# Altium PCB CC1125_ref.PcbDoc
Units mm, origin at the board's own origin, x right, y up, seen from the top; angles counter-clockwise.
Board outline 53 x 65 mm, 2 copper layers (Top Layer, Bottom Layer); 6 components, 15 nets, 51 pads, 3 vias.
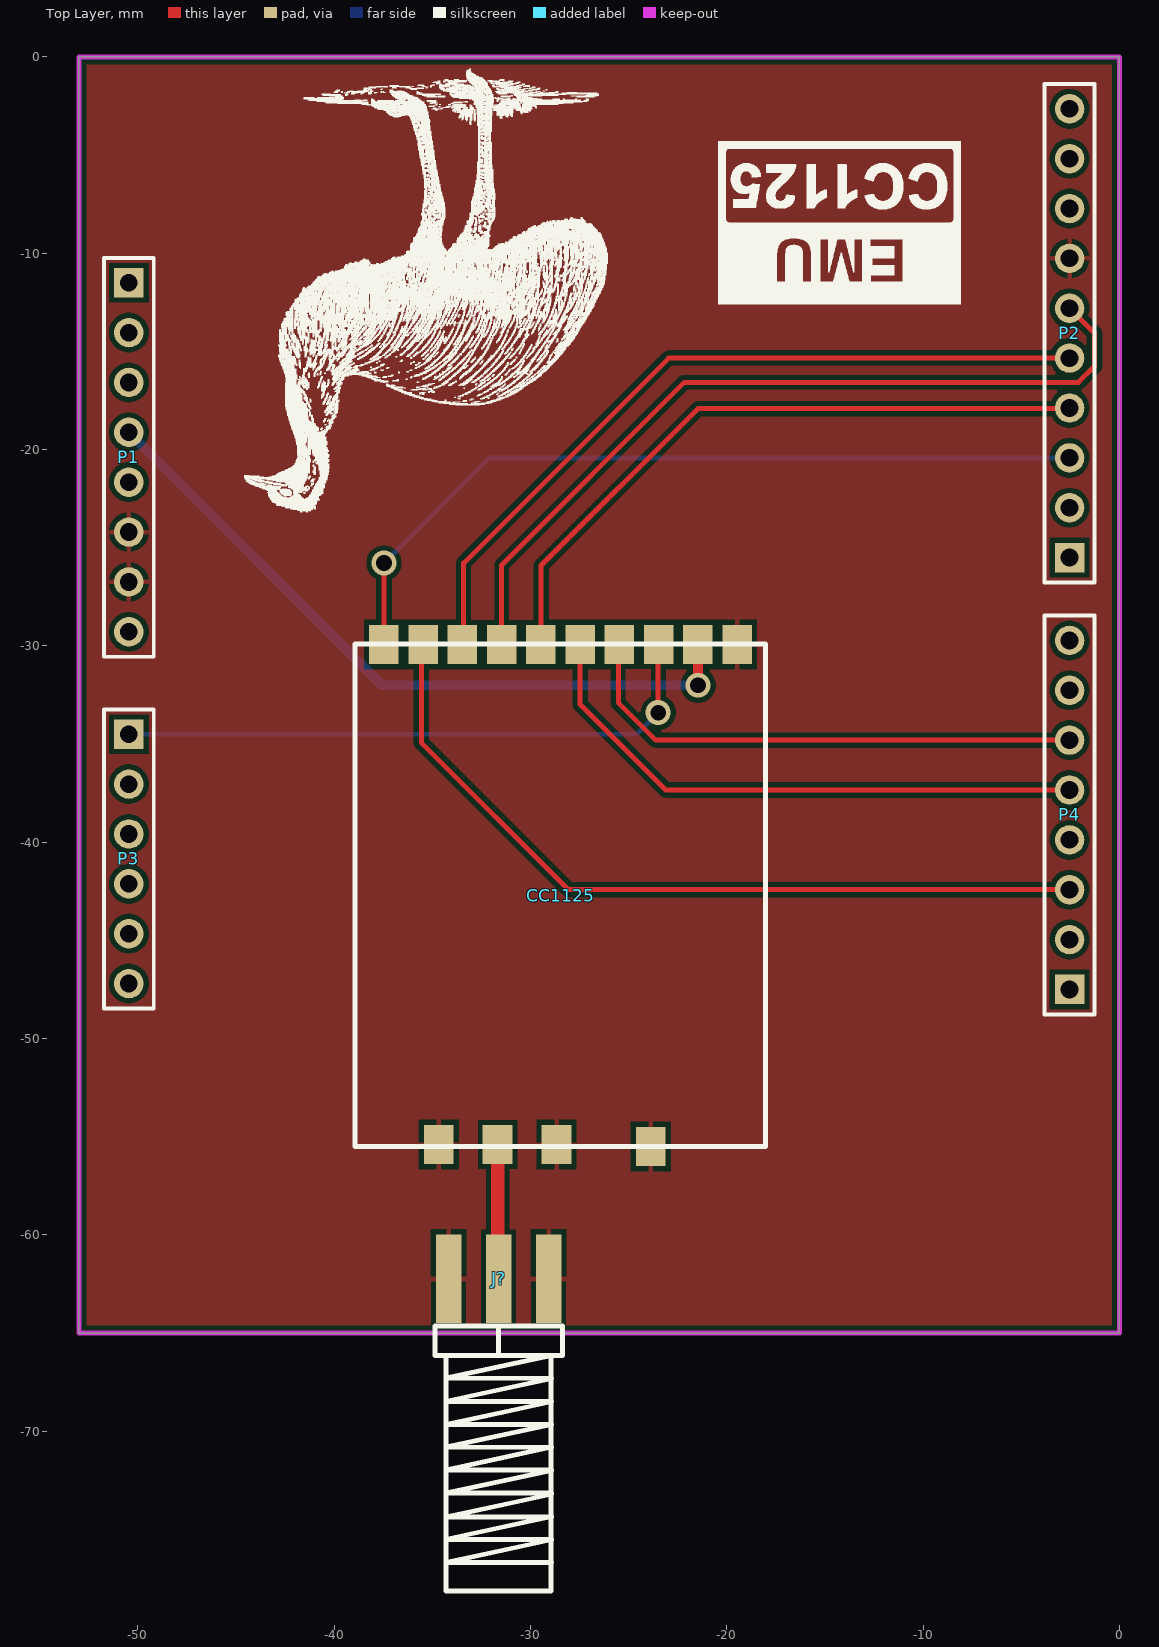
[diagram p0: Top Layer view]
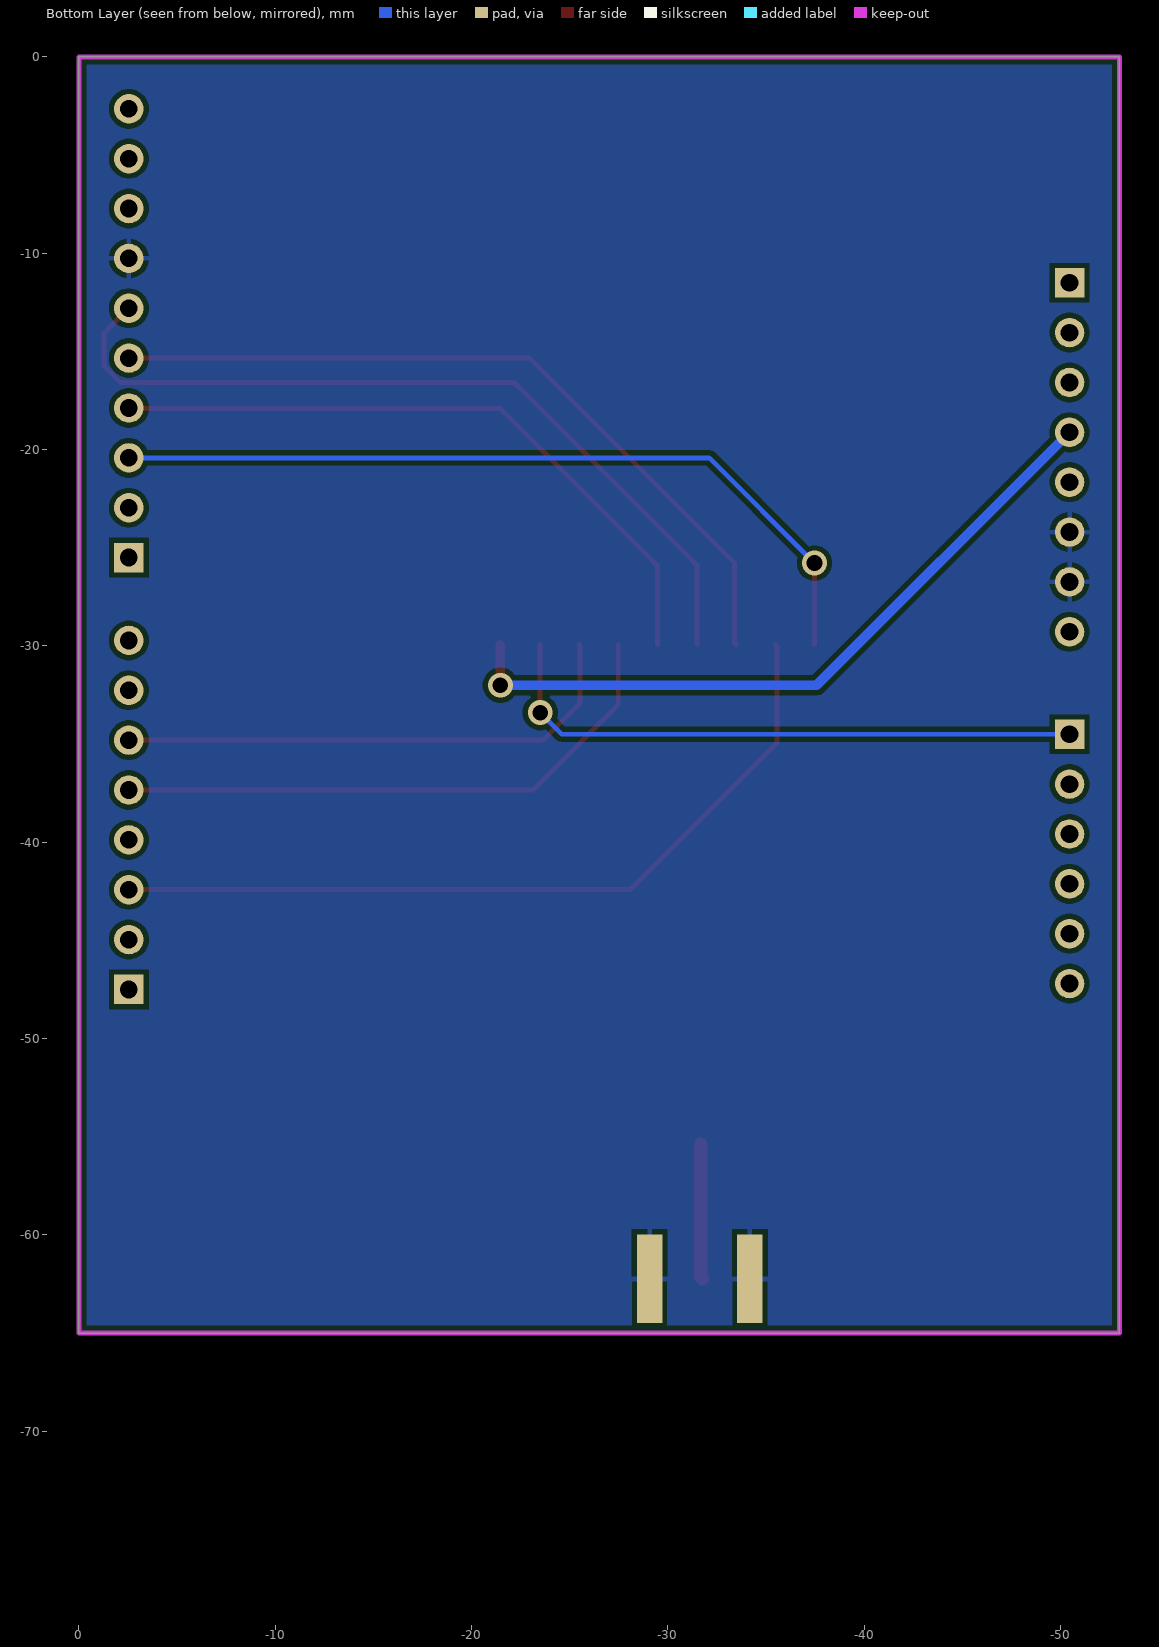
[diagram p1: Bottom Layer view, seen from below]

## Layer stack, top to bottom
Top Solder: solder mask 0.0102, Solder Resist, Dk 3.5
Top Layer: signal copper 0.0356
Dielectric 1: dielectric 0.32, FR-4, Dk 4.8
Bottom Layer: signal copper 0.0356
Bottom Solder: solder mask 0.0102, Solder Resist, Dk 3.5

## Board outline
-53,-65 -53,0 0,0 0,-65

## Design rules (kind name [scope] priority, off if disabled: settings)
Clearance [All] p1: gap=0.254 ignorepadtopadclearanceinfootprint=FALSE except(0: Arc-Hole Track-Hole SMDPad-Hole THPad-Hole Via-Hole Fill-Hole Poly-Hole Region-Hole Text-Hole)
PolygonConnect [All] p1: connectstyle=Relief reliefconductorwidth=0.254 reliefentries=4 polygonreliefangle="90 Angle" airgapwidth=0.254
RoutingVias [All] p1: holewidth=0.711 width=1.27 viastyle="Through Hole" minholewidth=0.711 minwidth=1.27 maxholewidth=0.711 maxwidth=1.27
SolderMaskExpansion [All] p1: expansion=0.102 istentingtop=FALSE
Width [All] p1: maxlimit=0.254 minlimit=0.254 preferedwidth=0.254
30 further rules are at their usual default settings.

## Classes and differential pairs
component class CC1125_ref: J? P1 P2 P3 P4

## Components (designator, comment, footprint, x,y, rotation, side; value= is the part's Value field where it differs from the comment)
CC1125 "Header 7X2" CC1125-TR-4S -18.085,-29.999 r180 top
J? "RF_IO" PCBComponent_1 -31.675,-64.552 r180 top
P1 "Header 8" HDR1X8 -50.46,-11.5 r270 top
P2 "Header 10" HDR1X10 -2.54,-25.5 r90 top
P3 "Header 6" HDR1X6 -50.46,-34.5 r270 top
P4 "Header 8" HDR1X8 -2.54,-47.5 r90 top

## Footprints (in the part's own frame and the unit in brackets; to place one, negate y for a bottom-side part, rotate by r counter-clockwise, add the part's x,y. Pads: shape width x height; smd on the part's side, far side on the other; paste and mask are expansions set on the pad)
CC1125-TR-4S [mm]
  rect 1.5x2 smd: 1(1.385,-0.067) 2(3.385,-0.067) 3(5.385,-0.067) 4(7.385,-0.067) 5(9.385,-0.067) 6(11.385,-0.067) 7(13.385,-0.067) 8(15.385,-0.067) 9(17.385,-0.067) 10(19.385,-0.067)
  rect 1.524x2 smd: 11(16.589,25.4) 12(13.589,25.4) 13(10.589,25.4) 14(5.791,25.5)
  silkscreen extent -0.05,-0.1 20.85,25.5
HDR1X6 [mm] "Connector; Header; 6 Position"
  rect 1.5x1.5 hole 0.9: 1(0,0)
  round 1.5 hole 0.9: 2(2.54,0) 3(5.08,0) 4(7.62,0) 5(10.16,0) 6(12.7,0)
  silkscreen extent -1.27,-1.27 13.97,1.27
HDR1X8 [mm] "Connector; Header; 8 Position"
  rect 1.5x1.5 hole 0.9: 1(0,0)
  round 1.5 hole 0.9: 2(2.54,0) 3(5.08,0) 4(7.62,0) 5(10.16,0) 6(12.7,0) 7(15.24,0) 8(17.78,0)
  silkscreen extent -1.27,-1.27 19.05,1.27
HDR1X10 [mm] "Connector; Header; 10 Position"
  rect 1.5x1.5 hole 0.9: 1(0,0)
  round 1.5 hole 0.9: 2(2.54,0) 3(5.08,0) 4(7.62,0) 5(10.16,0) 6(12.7,0) 7(15.24,0) 8(17.78,0) 9(20.32,0) 10(22.86,0)
  silkscreen extent -1.27,-1.27 24.13,1.27
PCBComponent_1 [mm]
  rect 1.3x4.5 smd: 1(-0.052,-2.322) 2(-2.602,-2.322) 2(2.498,-2.322)
  rect 1.3x4.5 smd far side: 2(-2.602,-2.322) 2(2.498,-2.322)
  silkscreen extent -3.3,0.09 3.2,13.59

## Part data
CC1125: "Header, 7-Pin, Dual row", LatestRevisionDate=17-Jul-2002, LatestRevisionNote="Re-released for DXP Platform.", Publisher="Altium Limited"
J?: library part SMB, "SMB Straight Connector", LatestRevisionDate=17-Jul-2002, LatestRevisionNote="Re-released for DXP Platform.", Publisher="Altium Limited"
P1 P4: "Header, 8-Pin", LatestRevisionDate=17-Jul-2002, LatestRevisionNote="Re-released for DXP Platform.", Publisher="Altium Limited"
P2: "Header, 10-Pin", LatestRevisionDate=17-Jul-2002, LatestRevisionNote="Re-released for DXP Platform.", Publisher="Altium Limited"
P3: "Header, 6-Pin", LatestRevisionDate=17-Jul-2002, LatestRevisionNote="Re-released for DXP Platform.", Publisher="Altium Limited"

## Via types
v1: diameter 1.27, hole 0.8, Top Layer to Bottom Layer, 3 vias

## Nets (pads, with @x,y where several pads share a name; then routed paths per layer and width w, separated by ;. In a path a pad name is that pad's centre, name@x,y a point inside that pad or via, vN(x,y) a via of type N, cw(c..) or ccw(c..) an arc to the next point about the centre after c; other vN are vias at no path point)
Ant: CC1125.12 J?.1 | length 6.9
  Top Layer w0.7: J?.1@-31.76,-62.23 -31.674,-62.144 CC1125.12
CSN: CC1125.10 P2.3 | length 41.3
  Top Layer w0.254: CC1125.10 -37.465,-29.927 v1(-37.465,-25.781)
  Bottom Layer w0.254: v1(-37.465,-25.781) -32.104,-20.42 P2.3
DIO0: CC1125.9 P4.3 | length 41.2
  Top Layer w0.254: CC1125.9 -35.56,-30.022 -35.56,-34.925 -28.065,-42.42 P4.3
DIO1: P4.4
DIO2: CC1125.5 P4.5 | length 29.8
  Top Layer w0.254: CC1125.5 -27.47,-32.982 -23.112,-37.34 P4.5
DIO3: CC1125.4 P4.6 | length 26.8
  Top Layer w0.254: CC1125.4 -25.527,-29.989 -25.527,-32.893 -23.62,-34.8 P4.6
DIO4: P2.1
DIO5: P2.2
Enable: CC1125.1 CC1125.11 CC1125.13 CC1125.14 J?.2 P1.6 P1.7 P2.7
MISO: CC1125.8 P2.5 | length 39.4
  Top Layer w0.254: CC1125.8 -33.401,-29.863 -33.401,-25.781 -22.96,-15.34 P2.5
MOSI: CC1125.6 P2.4 | length 34.3
  Top Layer w0.254: CC1125.6 -29.464,-29.926 -29.464,-25.908 -21.463,-17.907 -2.567,-17.907 P2.4
RESET: CC1125.3 P3.1 | length 30.9
  Top Layer w0.254: v1(-23.495,-33.401) -23.495,-29.957 CC1125.3
  Bottom Layer w0.254: P3.1 -24.594,-34.5 v1(-23.495,-33.401)
RXTX: P3.5
SCK: CC1125.7 P2.6 | length 41.9
  Top Layer w0.254: CC1125.7 -31.47,-25.882 -22.162,-16.574 -2.096,-16.574 -1.27,-15.748 -1.27,-14.07 P2.6
VBAT: CC1125.2 P1.4 | length 36.4
  Top Layer w0.254: CC1125.2 CC1125.2@-21.463,-29.939
  Top Layer w0.5: v1(-21.463,-32.004) CC1125.2@-21.463,-29.939
  Bottom Layer w0.254: P1.4 P1.4@-50.325,-19.255
  Bottom Layer w0.5: P1.4@-50.325,-19.255 -37.576,-32.004 v1(-21.463,-32.004)
pads on no net: P1.1 P1.2 P1.3 P1.5 P1.8 P2.8 P2.9 P2.10 P3.2 P3.3 P3.4 P3.6 P4.1 P4.2 P4.7 P4.8

## Polygon pours and split planes (outlines as drawn)
Enable on Top Layer "ENABLE_L01_P000" (solid, pour order 0): -53.086,-64.897 0,-64.897 -0.127,-64.77 -0.127,0.127 -53.086,0.127
Enable on Bottom Layer "ENABLE_L02_P001" (solid, pour order 1): -52.959,-0.254 -52.705,0 -0.127,0 -0.127,-64.897 0,-65.024 -53.086,-65.024

## Keep-outs
Keep-Out Layer:
  the board outline again, w0.254

## Silkscreen, mask and mechanical layers (free items; w line width, h text height)
Top Overlay:
  drawing of 11177 lines, arcs and shapes, not listed